# EAGLE board RCSfullschematic1 (EAGLE 7.5.0)
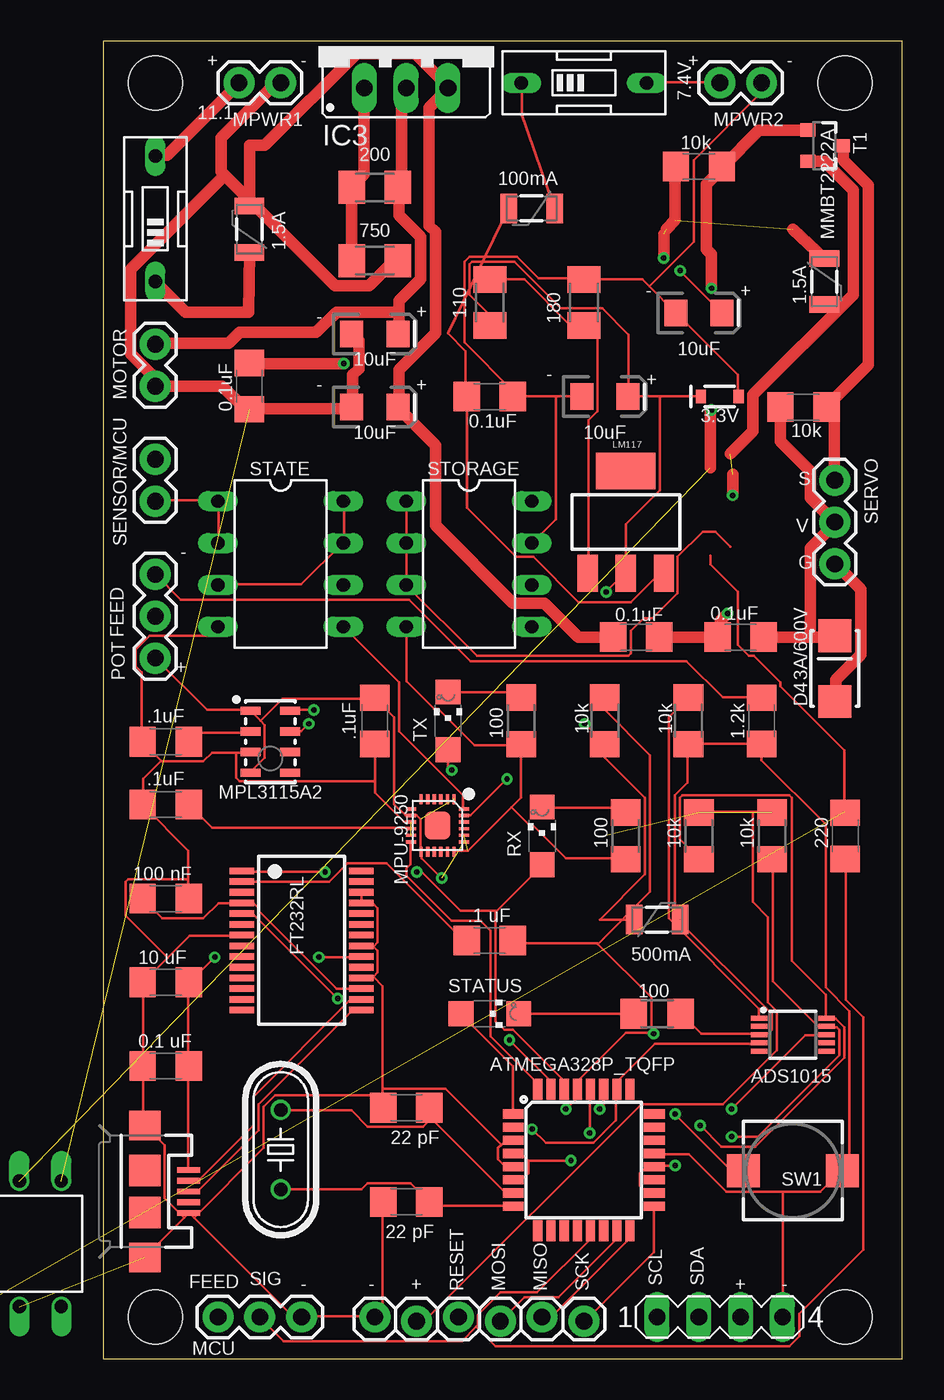
[diagram p0: board, top side]
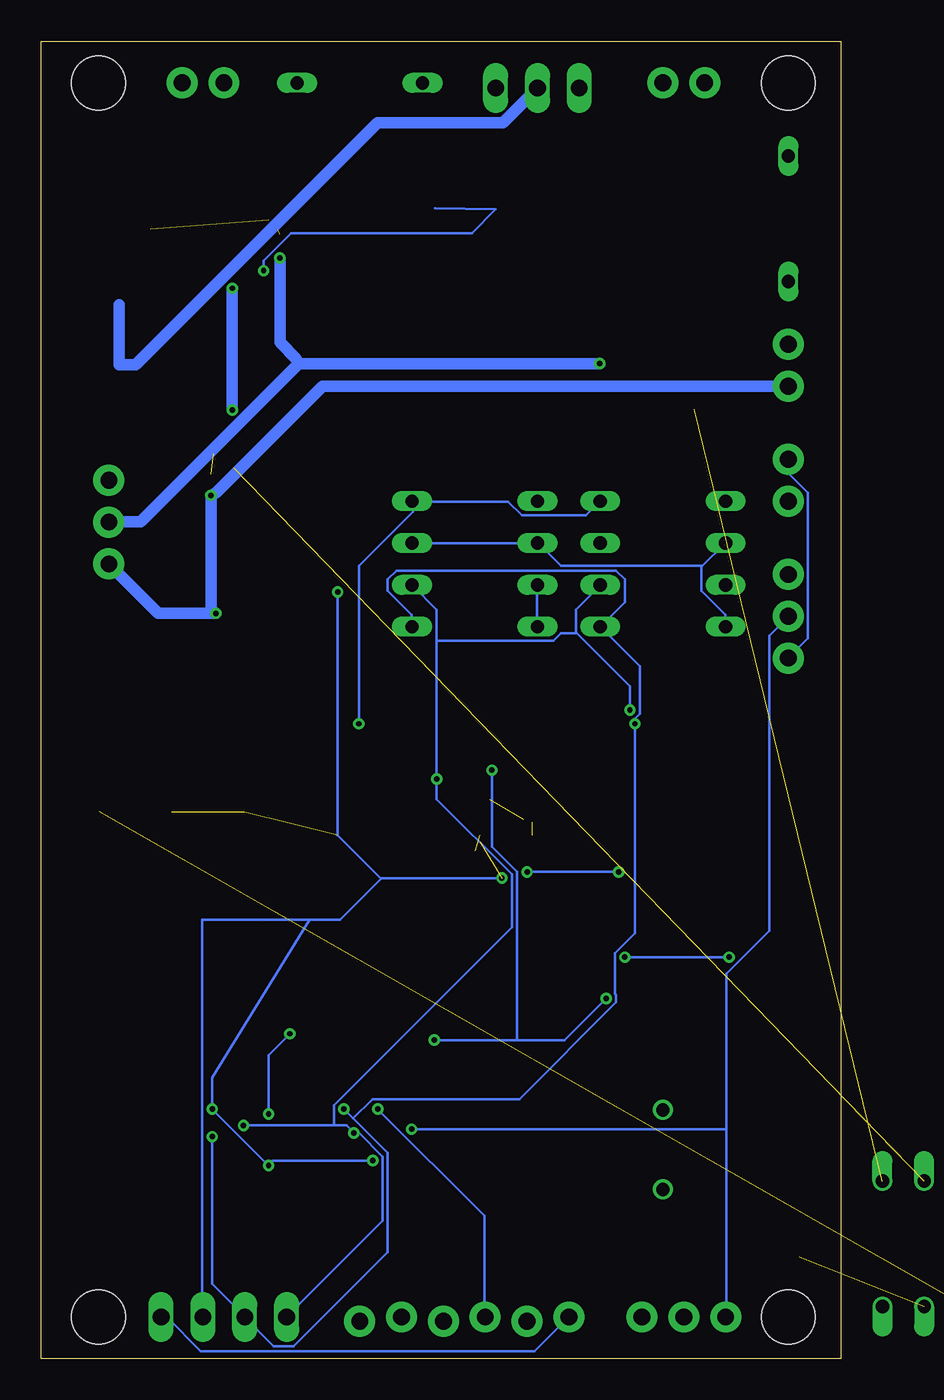
[diagram p1: board, bottom side, seen from below]

Size 48.56 x 80 mm. Coordinates in mm from the lower left corner, seen from the top.
Outline: 0,0 48.56,0 48.56,80 0,80 0,0
Copper layers (1*16): Top 0.0356mm / dielectric 1.5011mm / Bottom 0.0356mm
Design rules "LaenPCBOrder": minimum track width 6mil, minimum drill 13mil, track to track 6mil, track to pad 6mil, pad to pad 6mil, via to via 6mil, smd to smd 6mil, copper to edge 15mil, drill to drill 6mil, minimum pad ring 7mil, minimum via ring 7mil, stop-mask expansion 3mil, vias tented up to drill 0mil, thermal gap 10mil
Net classes: 1 Motor: width 0.699 mm
Holes 3.26 mm at 3.17,77.47 45.09,77.47 45.09,2.54 3.17,2.54

## Footprints (pad centres in the part's own frame; a part is rotated, then mirrored left to right if it is on the bottom)
1206 = smd 1.6 x 1.8: 1 -1.4,0; 2 1.4,0
C1206 = smd 1.6 x 1.8: 1 -1.4,0; 2 1.4,0
EIA3216 = smd 1.4 x 1.6: + 1.4,0; - -1.4,0
SOD-323@2 = smd 0.63 x 0.83: A 1.15,0; C -1.15,0
SMA-DIODE_ALT = smd 2 x 2: A -2,0; C 2,0
PTC-1206 = smd 1 x 1.8: 1 -1.4,0; 2 1.4,0
SSOP28 = smd 0.4 x 1.5: 1 -4.225,-3.625; 2 -3.575,-3.625; 3 -2.925,-3.625; 4 -2.275,-3.625; 5 -1.625,-3.625; 6 -0.975,-3.625; 7 -0.325,-3.625; 8 0.325,-3.625; 9 0.975,-3.625; 10 1.625,-3.625; 11 2.275,-3.625; 12 2.925,-3.625; 13 3.575,-3.625; 14 4.225,-3.625; 15 4.225,3.625; 16 3.575,3.625; 17 2.925,3.625; 18 2.275,3.625; 19 1.625,3.625; 20 0.975,3.625; 21 0.325,3.625; 22 -0.325,3.625; 23 -0.975,3.625; 24 -1.625,3.625; 25 -2.275,3.625; 26 -2.925,3.625; 27 -3.575,3.625; 28 -4.225,3.625
317TS = drill 1.016 long: 1 -2.54,-2.54; 2 0,-2.54; 3 2.54,-2.54
MA04-1 = drill 1.016 long: 1 -3.81,0; 2 -1.27,0; 3 1.27,0; 4 3.81,0
1X06_LOCK = drill 1.016 pad 1.88: 1 0,0; 2 2.54,-0.254; 3 5.08,0; 4 7.62,-0.254; 5 10.16,0; 6 12.7,-0.254
USB-MICROB = smd 0.35 x 1.4: D+ 0,2.65; D- -0.65,2.65; GND 1.3,2.65; ID 0.65,2.65; VBUS -1.3,2.65 | smd 1.8 x 1.9: MT1 -4,0; MT2 4,0 | smd 1.9 x 1.9: P$1 -1.27,0; P$2 1.27,0
1X02 = drill 1.016 pad 1.88: 1 0,0; 2 2.54,0
SOT223 = smd 1.219 x 2.235: 1 -2.311,-3.099; 2 0,-3.099; 3 2.311,-3.099 | smd 3.6 x 2.2: 4 0,3.099
1X03 = drill 1.016 pad 1.88: 1 0,0; 2 2.54,0; 3 5.08,0
DIL06 = drill 0.813 offset: 1 -2.54,-3.81; 2 0,-3.81; 3 2.54,-3.81; 4 2.54,3.81; 5 0,3.81; 6 -2.54,3.81
HC49/S = drill 0.813: 1 -2.413,0; 2 2.413,0
R1206 = smd 1.6 x 1.803: 1 -1.422,0; 2 1.422,0
M1206 = smd 1.6 x 2: 1 -1.4,0; 2 1.4,0
CHIPLED_1206 = smd 1.5 x 1.5: A 0,-1.75; C 0,1.75
DIL08 = drill 0.813 long: 1 -3.81,-3.81; 2 -1.27,-3.81; 3 1.27,-3.81; 4 3.81,-3.81; 5 3.81,3.81; 6 1.27,3.81; 7 -1.27,3.81; 8 -3.81,3.81
PUSHBUTTON_SMD_SJ = smd 2 x 2: P$1 3,0; P$2 -3,0
EDG-01 = drill 0.813 long: 1 0,-3.81; 2 0,3.81
SOT23-3 = smd 0.8 x 0.9: 1 -0.95,-1; 2 0.95,-1; 3 0,1.1
LGA-8 = smd 1.2 x 0.5: 1 -1.2,1.875; 2 -1.2,0.625; 3 -1.2,-0.625; 4 -1.2,-1.875; 5 1.2,-1.875; 6 1.2,-0.625; 7 1.2,0.625; 8 1.2,1.875
LEAD-QFN24 = smd 0.6 x 0.2: 1 -1.6,1; 2 -1.6,0.6; 3 -1.6,0.2; 4 -1.6,-0.2; 5 -1.6,-0.6; 6 -1.6,-1; 13 1.6,-1; 14 1.6,-0.6; 15 1.6,-0.2; 16 1.6,0.2; 17 1.6,0.6; 18 1.6,1 | smd 0.2 x 0.6: 7 -1,-1.6; 8 -0.6,-1.6; 9 -0.2,-1.6; 10 0.2,-1.6; 11 0.6,-1.6; 12 1,-1.6; 19 1,1.6; 20 0.6,1.6; 21 0.2,1.6; 22 -0.2,1.6; 23 -0.6,1.6; 24 -1,1.6 | smd 1.7 x 1.54: 25 0,0
TQFP32-08 = smd 1.27 x 0.559: 1 -4.293,2.8; 2 -4.293,2; 3 -4.293,1.2; 4 -4.293,0.4; 5 -4.293,-0.4; 6 -4.293,-1.2; 7 -4.293,-2; 8 -4.293,-2.8; 17 4.293,-2.8; 18 4.293,-2; 19 4.293,-1.2; 20 4.293,-0.4; 21 4.293,0.4; 22 4.293,1.2; 23 4.293,2; 24 4.293,2.8 | smd 0.559 x 1.27: 9 -2.8,-4.293; 10 -2,-4.293; 11 -1.2,-4.293; 12 -0.4,-4.293; 13 0.4,-4.293; 14 1.2,-4.293; 15 2,-4.293; 16 2.8,-4.293; 25 2.8,4.293; 26 2,4.293; 27 1.2,4.293; 28 0.4,4.293; 29 -0.4,4.293; 30 -1.2,4.293; 31 -2,4.293; 32 -2.8,4.293
MSOP10 = smd 0.3 x 1: 1 -1,-2.05; 2 -0.5,-2.05; 3 0,-2.05; 4 0.5,-2.05; 5 1,-2.05; 6 1,2.05; 7 0.5,2.05; 8 0,2.05; 9 -0.5,2.05; 10 -1,2.05

## Placement (x,y rotation side)
C1  .1uF  [1206]  3.81,37.47 180 top
C2  .1uF  [1206]  3.81,33.66 180 top
C3  .1uF  [1206]  16.51,38.73 270 top
C4  0.1uF  [1206]  38.73,43.81 180 top
C5  0.1uF  [1206]  8.89,59.05 270 top
C6  22 pF  [C1206]  18.41,9.53 0 top
C7  22 pF  [C1206]  18.41,15.24 0 top
C8  100 nF  [C1206]  3.81,27.94 180 top
C9  .1 uF  [C1206]  23.5,25.4 180 top
C10  10 uF  [C1206]  3.81,22.86 180 top
C11  0.1 uF  [C1206]  3.81,17.78 180 top
C12  0.1uF  [C1206]  23.5,58.42 0 top
C13  10uF  [EIA3216]  36.2,63.5 0 top
C14  10uF  [EIA3216]  30.48,58.42 0 top
C15  0.1uF  [C1206]  32.38,43.81 0 top
C16  10uF  [EIA3216]  16.51,57.78 0 top
C17  10uF  [EIA3216]  16.51,62.23 0 top
D1  3.3V  [SOD-323@2]  37.47,58.42 0 top
D4  3A/600V  [SMA-DIODE_ALT]  44.45,41.91 90 top
F1  1.5A  [PTC-1206]  43.81,65.41 270 top
F2  500mA  [PTC-1206]  33.66,26.67 0 top
F3  100mA  [PTC-1206]  26.04,69.85 180 top
F4  1.5A  [PTC-1206]  8.89,68.58 90 top
IC2  FT232RL  [SSOP28]  12.06,25.4 270 top
IC3  [317TS]  18.41,79.69 0 top
J1  [MA04-1]  37.47,2.54 0 top
J6  [1X06_LOCK]  16.51,2.54 0 top
J7  USB-MICROB  [USB-MICROB]  2.54,10.16 270 top
JP1  SENSOR/MCU  [1X02]  3.17,54.61 270 top
JP5  MOTOR  [1X02]  3.17,61.59 270 top
LM117  [SOT223]  31.75,50.8 0 top
MCU  [1X03]  6.99,2.54 0 top
MPWR1  11.1  [1X02]  10.79,77.47 180 top
MPWR2  7.4V  [1X02]  40.01,77.47 180 top
OK1  4N35  [DIL06]  -5.08,6.99 0 top
POT  [1X03]  3.17,42.55 90 top
Q2  8 MHz  [HC49/S]  10.79,12.7 90 top
R1  220  [1206]  45.09,31.75 90 top
R2  10k  [1206]  36.2,72.39 180 top
R3  10k  [1206]  42.55,57.78 0 top
R4  1.2k  [1206]  40.01,38.73 270 top
R5  10k  [R1206]  30.48,38.73 270 top
R6  10k  [R1206]  36.2,31.75 90 top
R7  10k  [R1206]  40.64,31.75 90 top
R8  100  [R1206]  25.4,38.73 90 top
R9  100  [R1206]  31.75,31.75 90 top
R10  100  [R1206]  33.66,20.95 180 top
R11  10k  [R1206]  35.56,38.73 270 top
R12  180  [M1206]  29.21,64.14 270 top
R13  110  [M1206]  23.5,64.14 270 top
R14  200  [M1206]  16.51,71.12 0 top
R15  750  [M1206]  16.51,66.67 180 top
RX  Yellow  [CHIPLED_1206]  26.67,31.75 0 top
SERVO  SMALL_SERVO  [1X03]  44.45,53.34 270 top
STATE  AT24CP  [DIL08]  10.79,48.26 270 top
STATUS  Green  [CHIPLED_1206]  23.5,20.95 270 top
STORAGE  AT24CP  [DIL08]  22.23,48.26 270 top
SW1  [PUSHBUTTON_SMD_SJ]  41.91,11.43 180 top
SW2  [EDG-01]  29.21,77.47 270 top
SW3  [EDG-01]  3.17,69.22 0 top
T1  MMBT2222A  [SOT23-3]  43.81,73.66 270 top
TX  Yellow  [CHIPLED_1206]  20.95,38.73 0 top
U1  MPL3115A2  [LGA-8]  10.16,37.47 0 top
U2  MPU-9250  [LEAD-QFN24]  20.32,32.38 270 top
U3  ATMEGA328P_TQFP  [TQFP32-08]  29.21,12.06 0 top
U4  ADS1015  [MSOP10]  41.91,19.68 270 top

## Library data of the parts
C1-C3 = SparkFun-Capacitors; PROD_ID: CAP-10057
C4 C5 R1-R4 = SparkFun-Passives
C6-C11 = eagle-ltspice; SPICEMODEL: NONE; SPICEPREFIX: C
C12 C15 R12-R15 = rcl
C13 C14 C16 C17 = SparkFun-Capacitors; PROD_ID: CAP-00811
D1 = SparkFun-DiscreteSemi; PROD_ID: DIO-08199
D4 = SparkFun-DiscreteSemi
F1-F4 = SparkFun-PowerIC; PROD_ID: RES-11150
IC2 = ftdichip; MPN: FT232RL; OC_FARNELL: 1146032; OC_NEWARK: 91K9918
IC3 = v-reg
J1 = con-lstb; OC_FARNELL: unknown; OC_NEWARK: unknown
J6 JP1 JP5 MCU MPWR1 MPWR2 POT = SparkFun-Connectors
J7 = SparkFun-Connectors; PROD_ID: CONN-09505
LM117 = SparkFun-IC-Power; PROD_ID: VREG-08170
OK1 = optocoupler; MF: FAIRCHILD SEMICONDUCTOR; MPN: 4N35; OC_FARNELL: 1328375; OC_NEWARK: 72K9946
Q2 = adafruit; OC_FARNELL: 1667008; OC_NEWARK: unknown
R5-R11 RX STATUS SW1 TX = adafruit
SERVO = SparkFun-Electromechanical
STATE STORAGE = atmel; MPN: AT24C1024BW-SH-B; OC_FARNELL: 1362646; OC_NEWARK: 03P2044
SW2 SW3 = special
T1 = SparkFun-DiscreteSemi; PROD_ID: TRANS-08049
U1 = SparkFun-Sensors; PROD_ID: IC-10869
U2 = invensense copy
U3 = SparkFun-DigitalIC; PROD_ID: IC-09069
U4 = SparkFun-AnalogIC; PROD_ID: IC-12239

## Nets
6V_POWER [Motor]: C4.1 C5.1 D4.C F1.1 R2.2 R3.1 SERVO.2
A4(SDA): J1.2 R7.1 STATE.5 STORAGE.5 U1.7 U2.24 U3.27 U4.9
A5(SCL): J1.1 R6.1 STATE.6 STORAGE.6 U1.8 U2.23 U3.28 U4.10
CS: U2.22
DM: IC2.16 J7.D-
DP: IC2.15 J7.D+
DTR: C9.2 IC2.2
FEEDBACK: MCU.1 POT.2 U3.26 U4.4
GND: C1.2 C2.2 C3.2 C6.1 C7.1 C8.1 C10.2 C11.2 C12.2 C13.- C14.- D1.A IC2.7 IC2.18 IC2.21 IC2.25 IC2.26 J1.4 J6.1 J7.GND J7.MT1 J7.MT2 JP1.2 MCU.3 MPWR2.1 OK1.2 R4.2 R8.1 R9.1 R10.1 R11.2 R12.1 STATE.1 STATE.2 STATE.4 STORAGE.1 STORAGE.2 STORAGE.3 STORAGE.4 STORAGE.7 SW1.P$2 U1.3 U2.9 U2.11 U2.18 U2.20 U3.3 U3.5 U3.21 U4.3
GND1 [Motor]: C4.2 C5.2 C15.2 C16.- C17.- D4.A JP5.2 MPWR1.1 OK1.4 R15.1 SERVO.3 T1.2
INT: U2.12 U3.32
INT1: U1.6
INT2: U1.5
LOGIC_VDD: C3.1 C14.+ D1.C F2.2 J1.3 JP1.1 LM117.2 POT.1 R6.2 R7.2 R13.2 U1.1 U1.4 U2.1 U2.8 U2.13 U2.19
MISO: J6.5 U3.16
MOSI: J6.4 U3.15
MOTOR: MCU.2 R1.1 U3.13
N$1: C1.1 U1.2
N$2 [Motor]: OK1.5 R2.1 T1.1
N$3: C2.1 U2.10
N$5: POT.3 R4.1
N$6: R11.1 U4.1
N$7: OK1.1 R1.2
N$8: C7.2 Q2.2 U3.7
N$9: C6.2 Q2.1 U3.8
N$10: R8.2 TX.C
N$11: R9.2 RX.C
N$12: STATUS.A U3.1
N$13: R10.2 STATUS.C
N$15: LM117.1 R12.2 R13.1
N$16: MPWR2.2 SW2.2
N$17: C12.1 C13.+ F3.2 LM117.3
N$18: F3.1 SW2.1
N$19 [Motor]: MPWR1.2 SW3.2
N$20 [Motor]: F4.1 SW3.1
N$21 [Motor]: C15.1 C16.+ F4.2 IC3.3
N$22 [Motor]: IC3.1 R14.1 R15.2
RESET: C9.1 J6.3 R5.1 SW1.P$1 U3.29
RX: IC2.1 RX.A U3.30
SCK: J6.6 U3.17
SIGNAL [Motor]: R3.2 SERVO.1 T1.3
TX: IC2.5 TX.A U3.31
USBVDD: C10.1 C11.1 IC2.20 J7.VBUS
VCC: F2.1 R5.2 STATE.3 STATE.7 STATE.8 STORAGE.8 U3.4 U3.6 U3.18 U3.20 U4.8
VDD: J6.2
VDD_IO: C8.2 IC2.4 IC2.17
VOUT-MOTOR [Motor]: C17.+ F1.2 IC3.2 JP5.1 R14.2

## Tracks (layer width: path | path; a pad name or v marks a point on that pad's centre or on a via)
6V_POWER  (via drill 0.33)  (2 unrouted)
  Top 0.699: 42.98,43.81 44.35,43.81 44.42,43.89 D4.C | 42.98,43.81 C4.1 | 34.21,68.58 34.75,69.11 34.75,72.39 R2.2 | v14.63,60.43 8.91,60.43 C5.1 | R3.1 41.15,57.76 41.15,55.7 42.98,53.87 42.98,52.27 SERVO.2 44.27,50.52 42.98,49.23 42.98,43.81 | v34.06,66.83 34.06,68.28 | F1.1 41.91,68.58
  Bottom 0.699: 32.92,60.43 v14.63,60.43 | 32.92,60.43 42.52,50.83 44.42,50.83 SERVO.2 | v34.06,66.83 34.06,61.72 33.07,60.73 32.92,60.43
A4(SDA)  (via drill 0.33)
  Top 0.152: STATE.5 17.98,41.07 17.98,38.1 21.87,34.21 21.87,33.45 U2.24 | v12.5,38.56 12.04,38.1 11.43,38.1 U1.7 | R7.1 40.69,30.33 40.69,22.94 43.43,20.19 43.89,20.19 U4.9 43.97,20.12 44.58,20.12 44.73,19.96 44.73,18.44 39.78,13.49 v38.18,13.49 | v30.18,15.16 30.4,15.39 30.4,16.31 U3.27
  Bottom 0.152: STORAGE.5 26.06,44.5 26.06,45.19 27.51,46.63 27.51,47.32 26.98,47.85 13.64,47.85 13.11,47.32 13.11,45.95 STATE.5 14.55,44.42 12.19,42.06 12.19,39.17 12.5,38.86 v12.5,38.56 12.5,25.83 13.72,24.61 13.72,22.17 13.64,22.1 13.64,21.64 19.51,15.77 28.42,15.77 29.6,14.59 | 29.6,14.59 27.51,12.5 27.51,6.48 33.22,0.76 34.44,0.76 36.2,2.52 J1.2 36.2,2.59 38.18,4.57 v38.18,13.49 | 29.6,14.59 v30.18,15.16
A5(SCL)  (via drill 0.33)
  Top 0.152: v12.8,39.4 11.43,39.4 U1.8 | v24.54,35.2 22.33,32.99 21.95,32.99 U2.23 | R6.1 36.2,30.4 35.05,31.55 35.05,34.06 35.2,34.21 41.68,34.21 41.83,34.06 41.83,24.16 43.89,22.1 43.89,20.73 U4.10 43.97,20.65 44.5,20.65 45.03,20.12 45.03,18.29 39.62,12.88 37.57,12.88 v36.27,14.17 | v29.57,13.72 29.57,16.31 U3.28
  Bottom 0.152: v12.8,39.4 12.8,40.84 16.04,44.08 | 16.04,44.08 16.08,44.12 16.08,45.49 14.63,46.94 STATE.6 | 24.54,43.59 24.54,45.49 STORAGE.6 | 24.54,43.59 v24.54,35.2 24.54,33.98 19.96,29.41 19.96,26.21 30.79,15.39 30.79,14.17 | 24.54,43.59 17.45,43.59 16.99,44.04 16.08,44.04 16.04,44.08 | J1.1 27.81,8.38 27.81,12.27 29.26,13.72 v29.57,13.72 30.02,14.17 30.79,14.17 | 30.79,14.17 v36.27,14.17
DM
  Top 0.152: J7.D- 5.26,10.82 5.79,10.82 9.14,14.17 9.14,15.93 15.01,21.79 15.62,21.79 IC2.16
DP
  Top 0.152: J7.D+ 5.26,10.21 5.79,10.21 9.45,13.87 9.45,15.47 15.09,21.11 15.62,21.11 IC2.15
DTR
  Top 0.152: IC2.2 8.46,28.96 13.72,28.96 14.86,30.1 17.22,30.1 21.87,25.45 22.02,25.45 C9.2
FEEDBACK  (via drill 0.33)
  Top 0.152: U4.4 39.85,19.13 33.53,19.13 31.24,16.84 31.24,16.38 U3.26 31.17,16.31 31.17,14.48 29.79,13.11 26.9,13.11 v26.06,13.95
  Bottom 0.152: 6.93,13.95 6.93,23.39 4.34,25.98 4.34,43.89 3.2,45.03 POT.2 | 6.93,13.95 6.93,2.59 MCU.1 | 6.93,13.95 v26.06,13.95
GND  (3 unrouted)
  Top 0.152: 16.54,35.05 16.54,37.26 C3.2 | 16.54,35.05 16.54,34.37 18.29,32.61 18.67,32.61 U2.9 | 8.08,36.8 6.63,36.8 6.1,36.27 3.58,36.27 3.54,36.31 | 8.08,36.8 8.91,36.8 U1.3 | 3.54,36.31 2.44,37.41 C1.2 2.36,37.49 2.36,41.68 1.98,42.06 1.98,43.05 2.82,43.89 6.4,43.89 6.93,44.42 STATE.4 | 3.54,36.31 2.44,35.2 2.44,33.68 C2.2 2.44,33.6 5.18,30.86 5.18,29.11 | 5.18,29.11 5.18,27.96 C8.1 | 16.54,35.05 8.31,35.05 8.08,35.28 8.08,36.8 | 24.19,12.99 24.46,13.26 U3.3 | 24.19,12.99 24,12.8 24,12.12 24.38,11.73 24.92,11.73 U3.5 | IC2.26 15.7,28.27 15.7,27.74 IC2.25 15.77,27.74 16.31,27.74 16.69,27.36 16.69,25.3 16.42,25.03 | 16.42,23.2 16.69,23.47 16.69,24.77 16.42,25.03 | 16.42,23.2 16.38,23.16 15.7,23.16 IC2.18 | 16.42,25.03 16.38,25.07 IC2.21 | 16.99,16.38 16.99,22.63 16.42,23.2 | 16.99,16.38 16.99,16 | 16.99,16 16.99,15.24 C7.1 16.99,16 | 24.19,12.99 20.8,16.38 16.99,16.38 | R10.1 35.13,20.95 36.35,19.74 39.85,19.74 U4.3 39.93,19.74 40.39,19.74 40.62,19.96 40.62,20.95 34.75,26.82 34.75,34.21 35.51,34.98 35.51,37.26 R11.2 35.59,37.34 R4.2 40.01,36.35 43.89,32.46 43.89,22.55 45.34,21.11 45.34,11.81 44.96,11.43 SW1.P$2 44.88,11.43 43.59,10.13 41.3,10.13 | 41.3,10.13 37.87,10.13 35.59,12.42 33.53,12.42 U3.21 | 41.3,10.13 41.3,2.59 J1.4 | C6.1 16.99,9.53 16.99,3.05 16.54,2.59 J6.1 16.46,2.59 12.12,2.59 MCU.3 12.04,2.59 11.51,2.59 5.52,8.57 | 4.92,8.57 2.52,6.17 J7.MT2 | 4.92,8.57 5.18,8.84 J7.GND 5.26,8.84 5.52,8.57 | 2.44,22.86 3.92,24.35 | 3.92,24.35 5.26,25.68 8.38,25.68 IC2.7 | 2.44,22.86 2.44,17.83 C11.2 2.44,17.75 2.44,14.25 2.52,14.17 J7.MT1 2.59,14.1 3.73,12.95 3.73,9.75 4.92,8.57
  Top 0.152: 2.44,22.86 C10.2 | 16.99,16 10.44,16 9.75,15.32 9.75,12.8 5.52,8.57 | 5.18,29.11 1.52,29.11 1.37,28.96 1.37,26.9 3.92,24.35 | 24.8,33.49 25.38,34.06 25.38,37.26 R8.1 25.3,37.26 22.55,37.26 20.34,39.47 20.12,39.47 18.44,41.15 18.44,44.42 STORAGE.4 | 24.8,33.49 22.17,30.86 21.34,30.86 U2.18 | 24.8,33.49 25.83,32.46 26.06,32.46 28.12,30.4 31.7,30.4 R9.1 | 38.1,49.3 37.19,50.22 36.42,50.22 34.9,48.69 34.9,46.48 33.38,44.96 32.84,44.96 32.08,44.2 32.08,42.82 31.93,42.67 22.71,42.67 18.44,46.94 STORAGE.3 18.44,47.02 18.44,49.53 | D1.A 38.56,58.45 38.56,59.74 34.82,63.48 C13.- 34.75,63.55 33.19,65.11 | 33.19,65.11 32.77,65.53 29.26,65.53 R12.1 29.18,65.61 26.44,65.61 25.15,66.9 22.25,66.9 21.95,66.6 21.95,61.72 24.92,58.75 24.92,58.52 C12.2 24.92,58.45 27.51,58.45 | MPWR2.1 40.01,76.89 35.89,72.77 35.89,67.82 33.19,65.11 | STATE.2 7.01,49.53 7.01,52.05 STATE.1 6.93,52.12 3.2,52.12 JP1.2 | 27.51,58.45 29.03,58.45 C14.- | 18.44,49.53 18.44,52.05 STORAGE.1 | 27.51,58.45 27.51,50.98 26.06,49.53 STORAGE.7 | 18.44,49.53 STORAGE.2
  Bottom 0.152: J6.1 18.59,0.46 38.86,0.46 40.92,2.52 41.22,2.52 J1.4 | STORAGE.4 18.44,44.5 18.44,46.94 STORAGE.3 | 8.42,48.12 7.01,49.53 STATE.2 | 8.42,48.12 8.46,48.08 8.46,46.63 7.01,45.19 7.01,44.5 STATE.4 | STORAGE.7 STORAGE.2 18.36,49.53 16.99,48.16 8.46,48.16 8.42,48.12
GND1  (via drill 0.33)  (2 unrouted)
  Top 0.699: C17.- 15.16,62.18 15.54,61.8 15.54,60.12 15.16,59.74 15.16,57.84 C16.- 14.78,57.68 8.91,57.68 C5.2 8.53,57.76 7.24,59.05 JP5.2 3.05,59.36 3.05,59.66 1.68,61.04 1.68,66.14 7.39,71.86 | R15.1 17.68,66.67 16.15,65.15 14.1,65.15 7.39,71.86 | 7.39,71.86 7.16,72.08 7.16,74.14 10.44,77.42 10.74,77.42 MPWR1.1 | C15.2 C4.2 37.49,44.12 37.49,44.81 v37.95,45.26 | D4.A 44.5,39.93 44.5,41.22 46.02,42.75 46.02,46.71 44.5,48.23 SERVO.3 | 38.1,54.94 39.47,56.31 39.47,58.52 45.57,64.62 45.57,70.94 43.81,72.69 42.82,72.69 T1.2 | 38.25,53.72 v38.25,52.43
  Bottom 0.699: 38.25,45.26 41.45,45.26 SERVO.3 | 38.25,45.26 v37.95,45.26 | 38.25,45.26 v38.25,52.43 37.95,52.58 31.47,59.05 JP5.2
INT
  Top 0.152: U2.12 18.67,31.32 18.67,30.02 18.44,29.79 18.44,29.34 21.18,26.59 22.94,26.59 23.55,25.98 23.55,19.58 26.36,16.76 26.36,16.38 U3.32
LOGIC_VDD  (via drill 0.33)  (5 unrouted)
  Top 0.152: 33.83,58.45 31.93,58.45 C14.+ 31.93,58.52 31.93,62.18 30.33,63.78 27.81,63.78 24.99,66.6 22.4,66.6 22.25,66.45 22.25,64.62 23.47,63.4 23.47,62.79 R13.2 | 33.83,58.45 36.27,58.45 D1.C | 33.83,58.45 33.83,52.73 31.77,50.67 31.77,47.7 LM117.2 31.7,47.7 v30.56,46.56 | 9.56,38.75 8.99,39.32 U1.1 8.91,39.4 6.33,39.4 POT.1 | 9.56,38.75 9.83,38.48 9.83,36.5 8.99,35.66 U1.4 | 9.56,38.75 10.9,40.08 16.46,40.08 C3.1 16.54,40.08 17.68,38.94 17.68,33.68 18.36,32.99 18.67,32.99 U2.8 18.75,32.99 19.05,32.99 19.28,32.77 19.28,30.86 U2.13 19.36,30.79 19.36,30.4 v20.57,29.18
  Bottom 0.152: J1.3 38.79,2.59 38.79,26.67 F2.2 30.4,26.67 27.93,29.15 | POT.1 1.98,43.74 1.98,52.58 3.12,53.72 3.12,54.56 JP1.1 | 27.93,29.15 27.89,29.18 v20.57,29.18 | v30.56,46.56 30.56,31.77 27.93,29.15
MISO
  Top 0.152: U3.16 32,7.32 27.28,2.59 26.67,2.59 J6.5
MOSI
  Top 0.152: U3.15 31.17,7.77 31.17,7.24 27.66,3.73 25.6,3.73 24.16,2.29 J6.4
MOTOR
  Top 0.152: 22.67,1.94 21.79,1.07 10.97,1.07 9.53,2.52 MCU.2 | 22.67,1.94 22.78,2.06 22.78,2.67 24.16,4.04 26.36,4.04 29.57,7.24 29.57,7.77 U3.13 | 22.67,1.94 23.85,0.76 41.68,0.76 42.29,1.37 42.29,2.74 46.18,6.63 46.18,20.73 45.11,21.79 45.11,30.33 R1.1
N$1
  Top 0.152: U1.2 8.91,38.02 5.79,38.02 5.26,37.49 C1.1
N$2  (via drill 0.33)  (1 unrouted)
  Top 0.699: T1.1 42.75,74.6 39.85,74.6 37.64,72.39 R2.1 37.41,72.08 36.65,71.32 36.65,67.36 36.96,67.06 v36.96,65 | 36.88,54.1 36.88,57.53 v36.96,57.61
  Bottom 0.699: v36.96,65 v36.96,57.61
N$3
  Top 0.152: U2.10 18.67,32.23 6.63,32.23 5.26,33.6 C2.1
N$5
  Top 0.152: R4.1 40.01,40.16 37.64,40.16 35.43,42.37 22.33,42.37 18.59,46.1 4.72,46.1 3.2,47.62 POT.3
N$6
  Top 0.152: U4.1 39.85,20.73 39.85,21.26 34.37,26.75 34.37,38.94 35.51,40.08 R11.1
N$7  (1 unrouted)
  Top 0.152: 36.88,48.77 36.88,48.23 38.56,46.56 38.56,43.36 39.24,42.67 39.55,42.67 41.15,41.07 41.15,40.84 45.03,36.96 45.03,33.22 R1.2
N$8
  Top 0.152: U3.7 24.92,10.13 24.38,10.13 19.89,14.63 19.89,15.24 C7.2 19.89,14.55 19.43,14.1 16.08,14.1 15.09,15.09 10.82,15.09 Q2.2
N$9
  Top 0.152: U3.8 24.92,9.3 20.12,9.3 19.89,9.53 C6.2 18.67,10.67 16.08,10.67 15.7,10.29 Q2.1
N$10
  Top 0.152: TX.C 20.95,40.46 25.07,40.46 25.38,40.16 R8.2
N$11
  Top 0.152: RX.C 26.67,33.45 31.47,33.45 31.7,33.22 R9.2
N$12
  Top 0.152: U3.1 24.92,17.75 21.72,20.95 STATUS.A
N$13
  Top 0.152: R10.2 STATUS.C
N$15
  Top 0.152: R13.1 23.55,65.53 25.6,65.53 28.35,62.79 29.18,62.79 R12.2 29.26,62.71 30.02,61.95 30.02,57.53 29.49,57 29.49,47.7 LM117.1
N$16
  Top 0.152: SW2.2 33.07,77.5 37.41,77.5 MPWR2.2
N$17  (via drill 0.33)
  Top 0.152: v35.05,66.06 37.57,63.55 C13.+ | F3.2 20.95,62.26 22.02,61.19 22.02,58.45 C12.1 22.1,58.37 22.1,51.66 25.07,48.69 26.14,48.69 28.88,45.95 32.08,45.95 33.83,47.7 LM117.3
  Bottom 0.152: v35.05,66.06 35.05,66.67 33.38,68.35 22.4,68.35 20.95,69.8 F3.2
N$18
  Top 0.152: F3.1 25.45,75.51 25.45,77.42 SW2.1
N$19
  Top 0.699: SW3.2 3.2,73.08 3.89,73.08 8.23,77.42 MPWR1.2
N$20
  Top 0.699: SW3.1 5.03,63.55 8.84,63.55 F4.1
N$21
  Top 0.699: C15.1 28.88,43.81 26.82,45.87 24.92,45.87 20.19,50.6 20.19,55.47 18.14,57.53 C16.+ 17.98,57.84 17.98,60.05 20.19,62.26 20.19,68.43 19.81,68.81 19.81,75.97 20.95,77.11 IC3.3 20.8,77.42 18.97,79.25 15.39,79.25 9.83,73.69 8.91,73.69 F4.2
N$22
  Top 0.699: R15.2 15.09,66.67 15.09,71.09 R14.1 15.32,71.4 15.85,71.93 15.85,77.11 IC3.1
RESET  (via drill 0.33)
  Top 0.152: 33.26,19.93 33.3,19.96 33.3,21.95 30.06,25.18 | 33.26,19.93 33.15,19.81 31.77,19.81 28.88,16.92 28.88,16.38 U3.29 28.8,16.31 28.8,15.85 v28.12,15.16 | 30.06,25.18 30.02,25.22 25.07,25.22 24.92,25.38 C9.1 | R5.1 30.48,39.4 33.22,36.65 33.22,28.35 30.06,25.18 | SW1.P$1 38.18,11.43 v34.75,14.86 | 33.26,19.93 v33.45,19.74
  Bottom 0.152: v34.75,14.86 34.75,18.44 v33.45,19.74 | v28.12,15.16 21.64,8.69 21.64,2.59 J6.3
RX  (via drill 0.33)
  Top 0.152: 23.89,27.16 26.67,29.95 RX.A | 23.89,27.16 23.85,27.13 23.85,20.5 24.38,19.96 24.92,19.96 27.96,16.92 27.96,16.38 U3.30 | v13.49,29.57 8.46,29.57 IC2.1 | v19.05,29.57 19.36,29.57 21.72,27.2 23.85,27.2 23.89,27.16
  Bottom 0.152: v19.05,29.57 v13.49,29.57
SCK
  Top 0.152: U3.17 33.45,9.22 33.45,6.48 29.26,2.29 J6.6
SIGNAL
  Top 0.699: T1.3 44.96,73.61 44.96,72.77 46.48,71.25 46.48,60.35 43.97,57.84 R3.2 44.2,57.53 44.42,57.3 44.42,53.34 SERVO.1
TX  (via drill 0.33)
  Top 0.152: v24.69,19.36 27.2,16.84 27.2,16.38 U3.31 | v14.25,21.87 9.14,26.98 8.46,26.98 IC2.5 | TX.A 20.95,35.97 v21.18,35.74
  Bottom 0.152: 19.66,19.36 16.76,19.36 v14.25,21.87 | 19.66,19.36 v24.69,19.36 | v21.18,35.74 21.18,31.09 19.66,29.57 19.66,19.36
USBVDD  (via drill 0.33)
  Top 0.152: J7.VBUS 5.18,11.51 5.18,17.75 C11.1 5.18,17.83 5.18,22.86 C10.1 5.26,22.86 v6.78,24.38 | v13.11,24.38 15.62,24.38 IC2.20
  Bottom 0.152: v6.78,24.38 v13.11,24.38
VCC  (via drill 0.33)
  Top 0.152: STATE.3 7.01,47.02 12.04,47.02 14.55,49.53 STATE.7 14.63,49.53 14.63,52.05 STATE.8 | 25.83,12.04 25.83,11.28 25.45,10.9 24.92,10.9 U3.6 | 25.83,12.04 25.45,12.42 24.92,12.42 U3.4 | U3.18 33.45,10.13 32.99,10.13 32.61,10.52 32.61,11.28 32.99,11.66 33.45,11.66 U3.20 33.53,11.73 v34.75,11.73 | v38.18,15.16 42.67,19.66 43.89,19.66 U4.8 | F2.1 30.18,26.67 32.92,29.41 32.92,34.06 30.48,36.5 R5.2 30.48,37.34 v29.26,38.56 | v28.42,12.04 25.83,12.04
  Bottom 0.152: STATE.8 15.47,51.21 19.36,51.21 20.19,52.05 25.98,52.05 STORAGE.8 25.98,51.97 25.98,51.44 29.26,48.16 v29.26,38.56 | F2.1 38.18,17.07 v38.18,15.16 v34.75,11.73 34.75,11.81 34.52,12.04 v28.42,12.04
VDD
  Top 0.152: 40.62,33.22 39.47,33.22 | 39.47,33.22 36.2,33.22 | 39.47,33.22 39.47,27.74 40.39,26.82 40.39,21.64 40.92,21.11 40.92,18.75 37.64,15.47 32.69,15.47 19.51,2.29 J6.2
VDD_IO
  Top 0.152: C8.2 2.44,27.89 3.58,26.75 6.1,26.75 7.01,27.66 8.38,27.66 IC2.4 8.46,27.66 9.14,27.66 9.45,27.36 9.45,27.2 14.17,22.48 15.62,22.48 IC2.17
VOUT-MOTOR
  Top 0.699: 17.98,63.55 17.98,64.24 19.28,65.53 19.28,68.12 17.98,69.42 17.98,71.09 R14.2 18.14,71.4 18.14,76.89 18.36,77.11 IC3.2 | 17.98,63.55 17.98,62.26 C17.+ | 17.98,63.55 14.17,63.55 12.95,62.33 8.31,62.33 7.62,61.65 3.2,61.65 JP5.1
  Bottom 0.699: F1.2 43.81,60.35 42.82,60.35 28.12,75.06 20.5,75.06 18.44,77.11 IC3.2

## Text on the board
tNames: + | - | + | - | - | + | - | + | - | + | - | + | S | V | - | G | FEED | + | FEED | SIG | - | - | + | RESET | MOSI | MISO | SCK | SCL | SDA | + | -